# EAGLE board board (EAGLE 9.0.0)
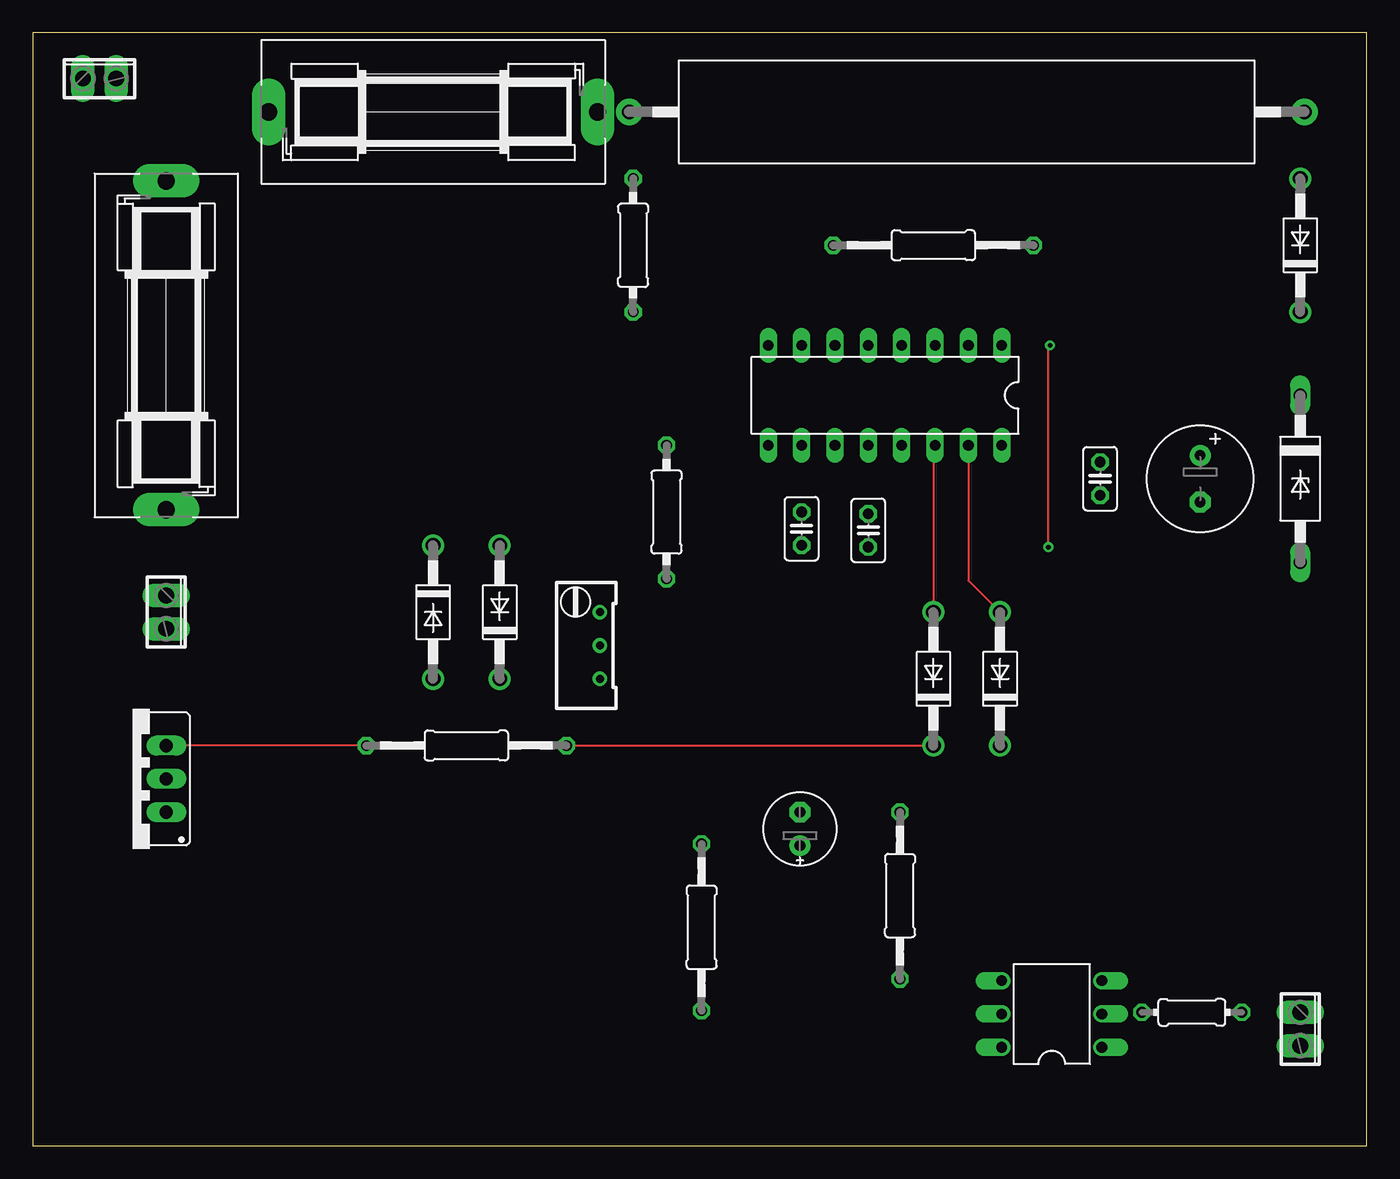
[diagram p0: board, top side]
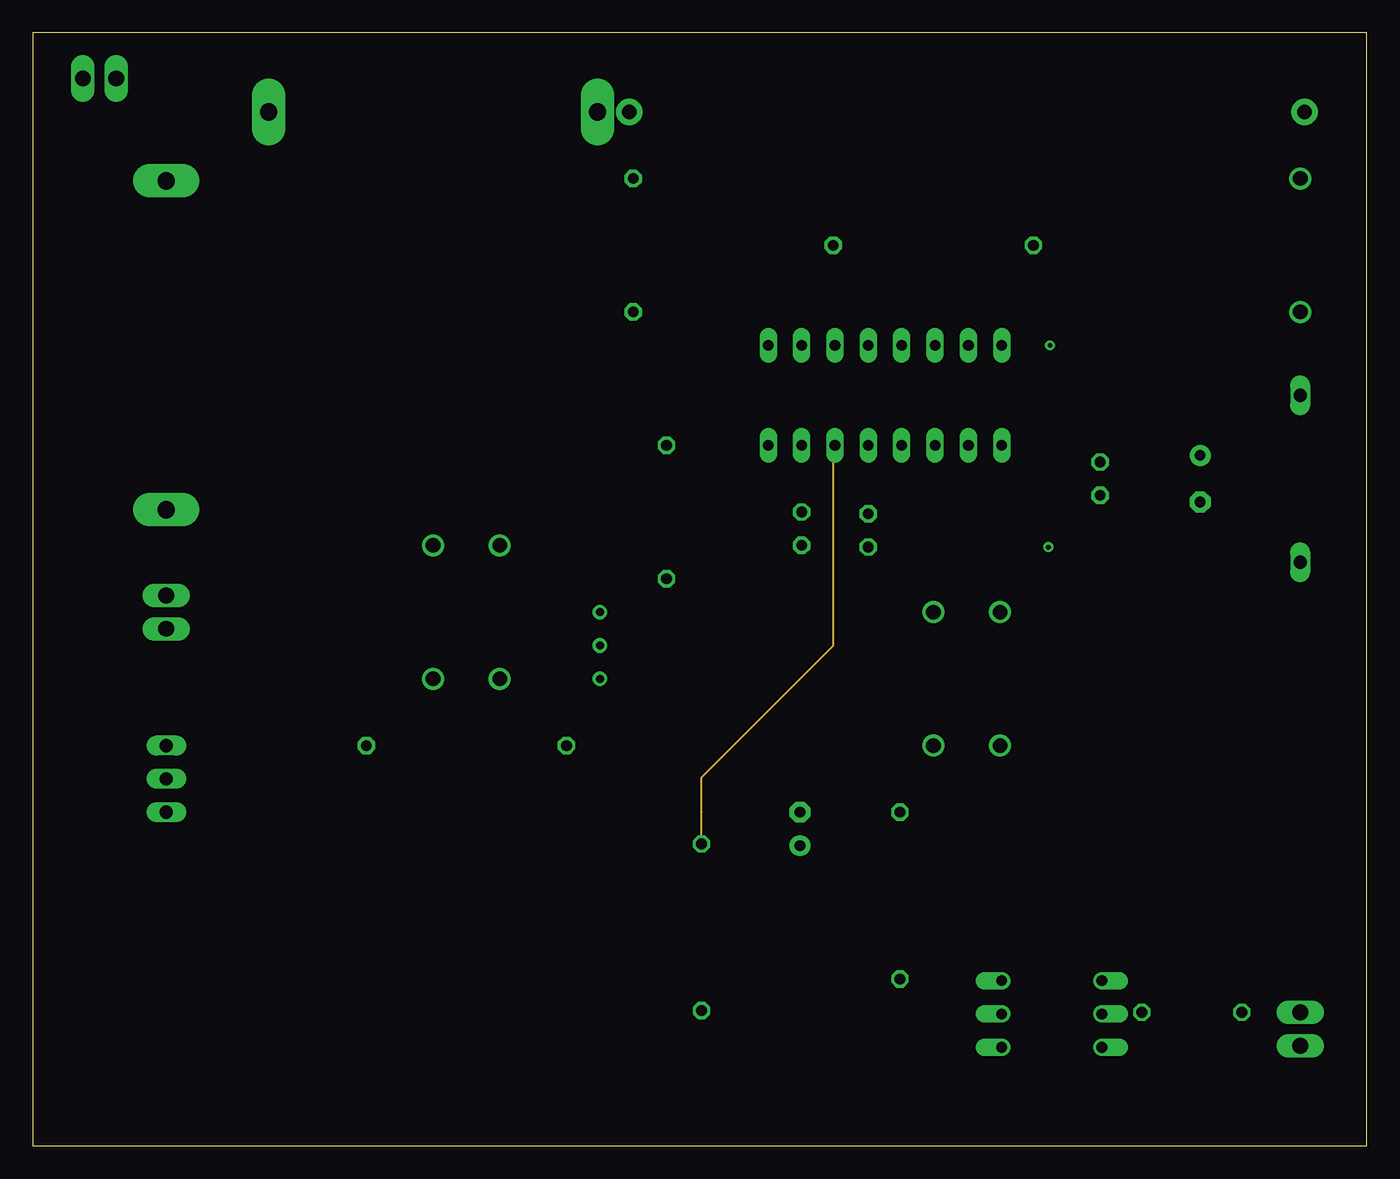
[diagram p1: board, inner layer Route8]
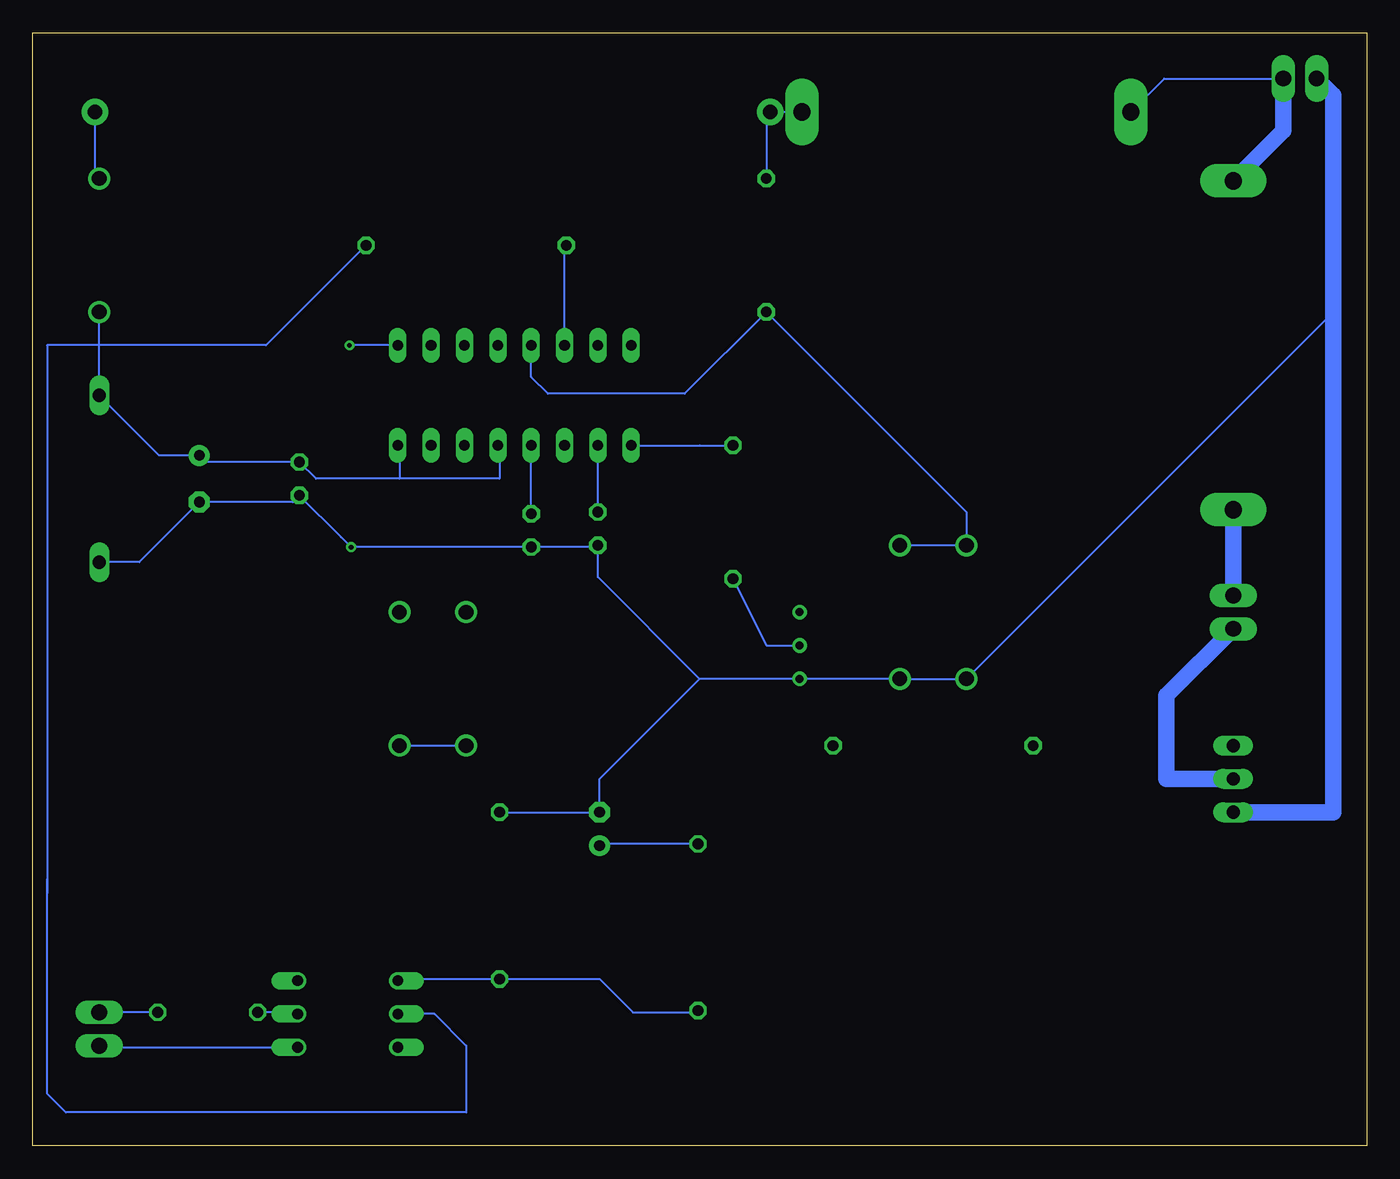
[diagram p2: board, bottom side, seen from below]

Size 101.58 x 84.76 mm. Coordinates in mm from the lower left corner, seen from the top.
Outline: 0,0 101.58,0 101.58,84.76 0,84.76 0,0
Copper layers (1*8*16): Top 0.035mm / dielectric 1.5mm / Route8 0.035mm / dielectric 0.15mm / Bottom 0.035mm
Design rules "default *": minimum track width 6mil, minimum drill 0.35mm, track to track 6mil, track to pad 6mil, pad to pad 6mil, via to via 6mil, smd to smd 6mil, copper to edge 40mil, drill to drill 6mil, minimum pad ring 10mil, minimum via ring 8mil, stop-mask expansion 4mil, vias tented up to drill 0mil, thermal gap 10mil

## Footprints (pad centres in the part's own frame; a part is rotated, then mirrored left to right if it is on the bottom)
E3,5-8 = drill 0.813 pad 1.6: + -1.778,0 | drill 0.813 pad 1.6 octagon: - 1.778,0
C025-025X050 = drill 0.813 octagon: 1 -1.27,0; 2 1.27,0
E2,5-6E = drill 0.813 pad 1.575: + -1.27,0 | drill 0.813 pad 1.575 octagon: - 1.27,0
F126Z12 = drill 1.016 long: A 6.35,0; C -6.35,0
DO41-10 = drill 1.118: A 5.08,0; C -5.08,0
SH25 = drill 1.321 pad 2.54 long: 1 -12.522,0; 2 12.522,0
DIL16 = drill 0.813 long: 1 -8.89,-3.81; 2 -6.35,-3.81; 3 -3.81,-3.81; 4 -1.27,-3.81; 5 1.27,-3.81; 6 3.81,-3.81; 7 6.35,-3.81; 8 8.89,-3.81; 9 8.89,3.81; 10 6.35,3.81; 11 3.81,3.81; 12 1.27,3.81; 13 -1.27,3.81; 14 -3.81,3.81; 15 -6.35,3.81; 16 -8.89,3.81
DIL06 = drill 0.813 offset: 1 -2.54,-3.81; 2 0,-3.81; 3 2.54,-3.81; 4 2.54,3.81; 5 0,3.81; 6 -2.54,3.81
AC10 = drill 1.1 pad 2: 1 -25.725,0; 2 25.7,0
0207/10 = drill 0.813 octagon: 1 -5.08,0; 2 5.08,0
RTRIM64W = drill 0.61: 1 1.27,-2.54; 2 1.27,0; 3 1.27,2.54
0207/15 = drill 0.813 octagon: 1 -7.62,0; 2 7.62,0
0204/7 = drill 0.813 octagon: 1 -3.81,0; 2 3.81,0
0207/12 = drill 0.813 octagon: 1 -6.35,0; 2 6.35,0
TO220CS = drill 1.016 long: A 0,-2.54; C -2.54,-2.54; G 2.54,-2.54
2POL254 = drill 1.2 long: 1 -1.27,0; 2 1.27,0

## Placement (x,y rotation side)
C1  470u  [E3,5-8]  88.9,50.8 270 top
C2  0.47u  [C025-025X050]  81.28,50.8 90 top
C3  1n  [C025-025X050]  58.55,46.99 90 top
C4  27n  [C025-025X050]  63.63,46.86 90 top
C5  1u  [E2,5-6E]  58.42,24.13 90 top
D1  15V  [F126Z12]  96.52,50.8 270 top
D2  1N4004  [DO41-10]  96.52,68.58 90 top
D3  1N4004  [DO41-10]  30.48,40.64 270 top
D4  1N4004  [DO41-10]  35.56,40.64 90 top
D5  1N4004  [DO41-10]  68.58,35.56 90 top
D6  1N4004  [DO41-10]  73.66,35.56 90 top
F1  1A  [SH25]  30.48,78.74 0 top
F2  10A  [SH25]  10.16,60.96 90 top
IC1  TCA785  [DIL16]  64.9,57.15 180 top
OK1  4N35  [DIL06]  77.6,10.03 90 top
R1  4.7k  [AC10]  71.12,78.74 180 top
R2  220k  [0207/10]  45.72,68.58 90 top
R3  200k  [RTRIM64W]  41.91,38.1 0 top
R4  22k  [0207/10]  48.26,48.26 90 top
R5  10k  [0207/15]  68.58,68.58 180 top
R6  560R  [0204/7]  88.27,10.16 0 top
R7  220R  [0207/15]  33.02,30.48 180 top
R8  10k  [0207/12]  66.04,19.05 270 top
R9  33k  [0207/12]  50.93,16.64 270 top
T1  BTV58  [TO220CS]  7.62,27.94 90 top
X1  [2POL254]  5.08,81.28 0 top
X2  [2POL254]  96.52,8.89 270 top
X3  [2POL254]  10.16,40.64 270 top

## Library data of the parts
C1-C5 R3-R9 = resistor
D1-D6 = diode
F1 F2 = fuse; MF: SCHURTER; MPN: 0031.8211; OC_FARNELL: 1162741; OC_NEWARK: 96B9380
IC1 = TCA785; AVAILABILITY: Unavailable; MF: Infineon Technologies; MP: TCA785; PACKAGE: DIP-16 Siemens; PRICE: None
OK1 = optocoupler; MF: FAIRCHILD SEMICONDUCTOR; MPN: 4N35; OC_FARNELL: 1328375; OC_NEWARK: 72K9946
R1 = resistor-power; OC_FARNELL: unknown; OC_NEWARK: unknown; P: 10W
R2 = resistor; SPICEPREFIX: R
T1 = triac
X1-X3 = con-phoenix-254; OC_FARNELL: unknown; OC_NEWARK: unknown

## Nets
GND: C1.- C2.1 C3.1 C4.1 C5.- D1.A D3.A D4.C IC1.1 R3.1 R8.1 T1.C X1.1
N$1: D2.A R1.1
N$2: R3.2 R4.1
N$3: D3.C D4.A IC1.5 R2.1
N$4: IC1.9 R4.2
N$5: C4.2 IC1.12
N$6: C3.2 IC1.10
N$7: IC1.6 R5.2
N$8: D6.A IC1.15
N$9: D5.A IC1.14
N$10: D5.C D6.C R7.1
N$11: R7.2 T1.G
N$12: F2.1 X3.1
N$13: F1.2 R1.2 R2.2
N$14: T1.A X3.2
N$15: OK1.4 R8.2 R9.2
N$16: R6.2 X2.1
N$17: OK1.2 R6.1
N$18: OK1.1 X2.2
PHASE: F1.1 F2.2 X1.2
VCC: C1.+ C2.2 D1.C D2.C IC1.13 IC1.16 OK1.5 R5.1
VIN: C5.+ IC1.11 R9.1

## Tracks (layer width: path | path; a pad name or v marks a point on that pad's centre or on a via)
GND  (via drill 0.35)
  Top 0.152: v77.34,45.59 77.34,60.83 v77.47,60.96
  Bottom 0.152: 2.54,63.5 D3.A D4.C R3.1 50.8,35.56 | 50.8,35.56 58.55,43.31 C3.1 58.67,45.59 C4.1 v77.34,45.59 78.11,46.35 C2.1 81.79,49.02 C1.- 93.47,44.45 D1.A | IC1.1 v77.47,60.96 77.72,60.96 | R8.1 C5.- 58.42,27.94 50.8,35.56
  Bottom 1.27: T1.C 2.54,25.4 2.54,63.5 2.54,66.04 2.54,68.58 2.54,71.12 2.54,80.01 X1.1
N$1
  Bottom 0.152: D2.A 96.84,73.98 R1.1
N$2
  Bottom 0.152: R4.1 45.72,38.1 R3.2
N$3
  Bottom 0.152: D4.A D3.C 30.48,48.26 R2.1 51.94,57.28 62.36,57.28 63.63,58.55 IC1.5
N$4
  Bottom 0.152: IC1.9 50.8,53.34 R4.2
N$5
  Bottom 0.152: C4.2 IC1.12
N$6
  Bottom 0.152: C3.2 IC1.10
N$7
  Bottom 0.152: IC1.6 61.09,68.45 R5.2
N$8
  Top 0.152: IC1.15 71.25,43.05 D6.A
N$9
  Top 0.152: IC1.14 68.58,53.21 D5.A
N$10
  Top 0.152: R7.1 D5.C
  Bottom 0.152: D6.C D5.C
N$11
  Top 0.152: R7.2 T1.G
N$12
  Bottom 1.27: X3.1 F2.1
N$13
  Bottom 0.152: F1.2 R1.2 45.72,78.44 R2.2
N$14
  Bottom 1.27: X3.2 15.24,34.29 15.24,27.94 T1.A
N$15
  Bottom 0.152: OK1.4 73.66,12.7 R8.2 58.42,12.7 55.88,10.16 51.05,10.16 R9.2
N$16
  Bottom 0.152: R6.2 X2.1
N$17
  Bottom 0.152: OK1.2 81.53,10.16 R6.1
N$18
  Bottom 0.152: X2.2 96.39,7.49 OK1.1
PHASE
  Bottom 0.152: F1.1 15.42,81.28 X1.2
  Bottom 1.27: X1.2 6.35,77.29 F2.2
VCC
  Bottom 0.152: IC1.13 66.04,53.21 66.04,50.8 73.66,50.8 | 73.66,50.8 80.01,50.8 C2.2 88.39,52.07 C1.+ 91.95,52.58 D1.C 96.52,60.96 | 96.52,60.96 D2.C | R5.1 83.82,60.96 96.52,60.96 | IC1.16 73.66,53.21 73.66,50.8 | 96.52,60.96 100.49,60.96 100.49,20.32 | 100.49,20.32 100.49,19.21 | OK1.5 70.99,10.03 68.58,7.62 68.58,2.54 99.06,2.54 100.49,3.97 100.49,20.32
VIN
  Route8 0.152: R9.1 50.93,25.4 50.93,28.07 60.96,38.1 60.96,53.34 IC1.11
  Bottom 0.152: R9.1 58.29,22.99 C5.+